# EAGLE board Opto_2 (EAGLE 6.5.0)
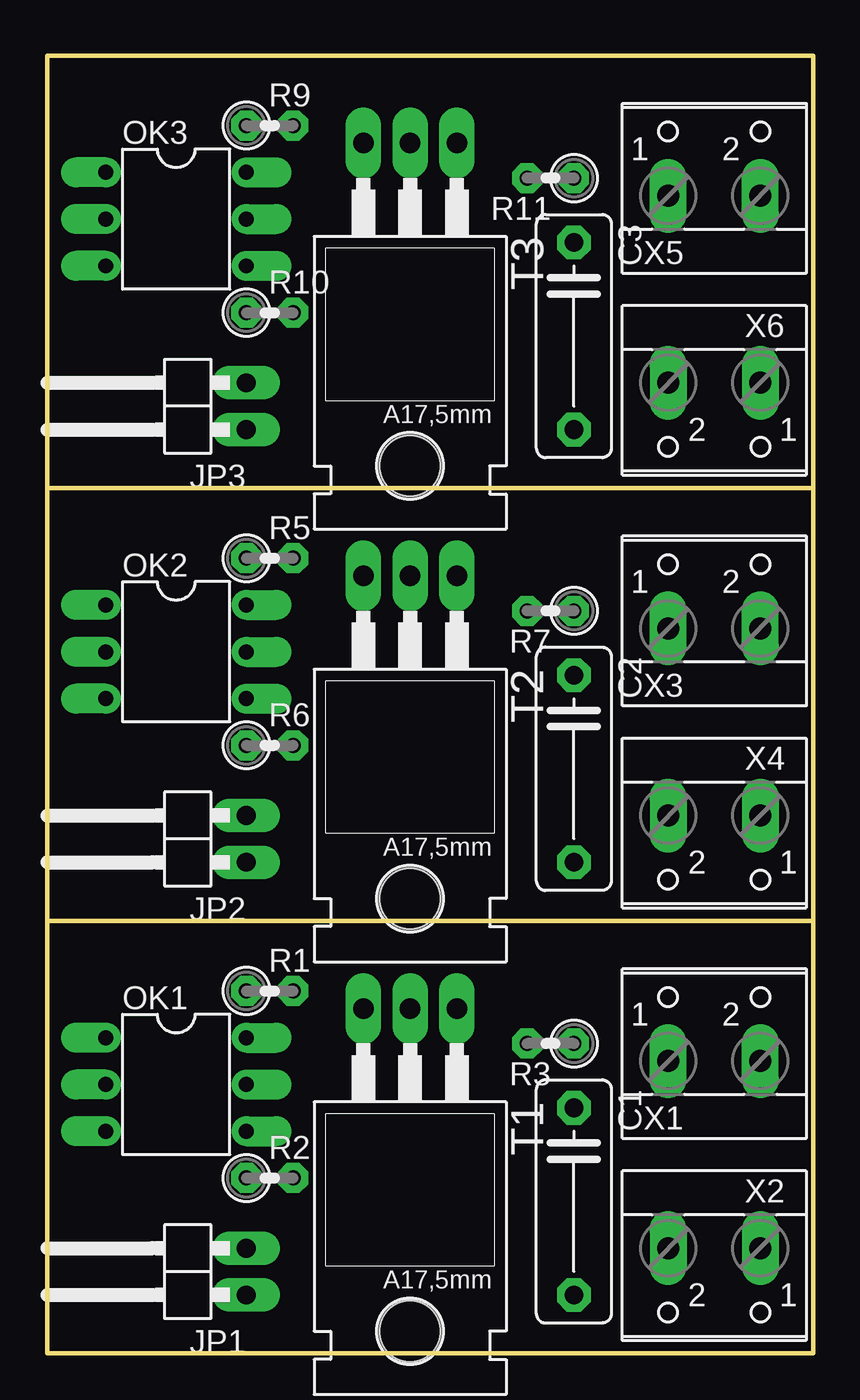
[diagram p0: board, top side]
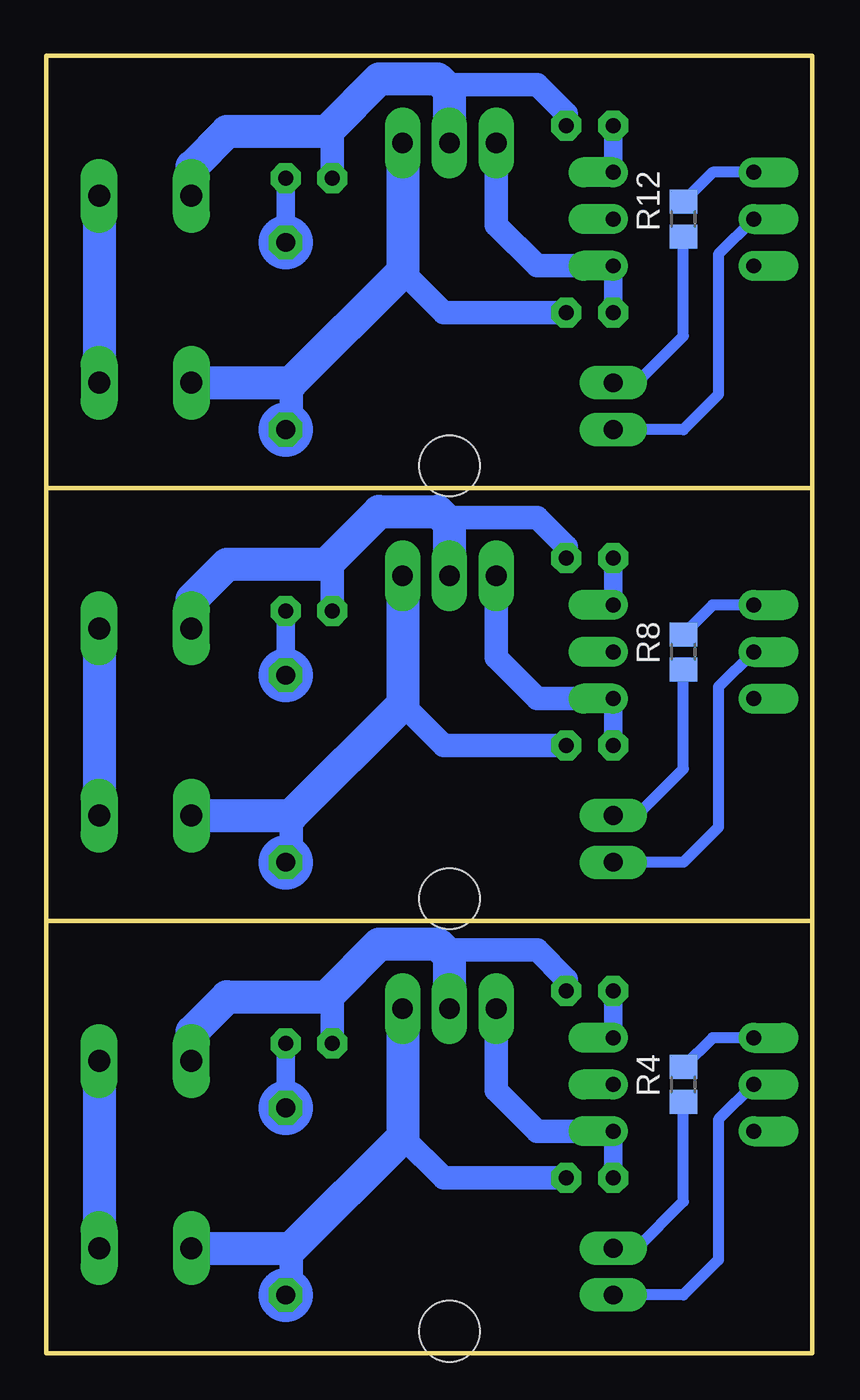
[diagram p1: board, bottom side, seen from below]

Size 41.58 x 70.47 mm. Coordinates in mm from the lower left corner, seen from the top.
Outline: 0,0 41.58,0 41.58,23.48 0,23.48 0,0
Outline: 0,23.5 41.58,23.5 41.58,46.98 0,46.98 0,23.5
Outline: 0,46.99 41.58,46.99 41.58,70.47 0,70.47 0,46.99
Copper layers (1*16): Top 0.035mm / dielectric 1.5mm / Bottom 0.035mm
Design rules "default": minimum track width 12mil, minimum drill 32mil, track to track 12mil, track to pad 12mil, pad to pad 12mil, via to via 12mil, smd to smd 8mil, copper to edge 40mil, drill to drill 8mil, minimum pad ring 16mil, minimum via ring 12mil, stop-mask expansion 4mil, vias tented up to drill 0mil, thermal gap 20mil

## Footprints (pad centres in the part's own frame; a part is rotated, then mirrored left to right if it is on the bottom)
C102-043X133 = drill 1.016 octagon: 1 -5.08,0; 2 5.08,0
1X02/90 = drill 1.016 long: 1 -1.27,-3.81; 2 1.27,-3.81
DIL06 = drill 0.813 offset: 1 -2.54,-3.81; 2 0,-3.81; 3 2.54,-3.81; 4 2.54,3.81; 5 0,3.81; 6 -2.54,3.81
0207/2V = drill 0.813 octagon: 1 -1.27,0; 2 1.27,0
R0805 = smd 1.3 x 1.5: 1 -0.95,0; 2 0.95,0
TO220AB = drill 1.118 long: 1 -2.54,-6.35; 2 0,-6.35; 3 2.54,-6.35 | hole 3.302: 0,11.176
W237-102 = drill 1.194 long: 1 -2.5,-1.27; 2 2.5,-1.27

## Placement (x,y rotation side)
C1  0.01uF  [C102-043X133]  28.57,8.26 270 top
C2  0.01uF  [C102-043X133]  28.57,31.75 270 top
C3  0.01uF  [C102-043X133]  28.57,55.24 270 top
JP1  [1X02/90]  6.99,4.45 90 top
JP2  [1X02/90]  6.99,27.94 90 top
JP3  [1X02/90]  6.99,51.44 90 top
OK1  MOC3022M  [DIL06]  6.99,14.61 270 top
OK2  MOC3022M  [DIL06]  6.99,38.1 270 top
OK3  MOC3022M  [DIL06]  6.99,61.59 270 top
R1  200  [0207/2V]  12.06,19.68 0 top
R2  470k  [0207/2V]  12.06,9.53 0 top
R3  39  [0207/2V]  27.3,16.83 180 top
R4  470  [R0805]  6.99,14.61 90 bottom
R5  200  [0207/2V]  12.06,43.18 0 top
R6  470k  [0207/2V]  12.06,33.02 0 top
R7  39  [0207/2V]  27.3,40.32 180 top
R8  470  [R0805]  6.99,38.1 90 bottom
R9  200  [0207/2V]  12.06,66.67 0 top
R10  470k  [0207/2V]  12.06,56.52 0 top
R11  39  [0207/2V]  27.3,63.82 180 top
R12  470  [R0805]  6.99,61.59 90 bottom
T1  BT136  [TO220AB]  19.68,12.38 180 top
T2  BT136  [TO220AB]  19.68,35.88 180 top
T3  BT136  [TO220AB]  19.68,59.37 180 top
X1  [W237-102]  36.2,17.14 0 top
X2  [W237-102]  36.2,4.45 180 top
X3  [W237-102]  36.2,40.64 0 top
X4  [W237-102]  36.2,27.94 180 top
X5  [W237-102]  36.2,64.14 0 top
X6  [W237-102]  36.2,51.44 180 top

## Library data of the parts
C1-C3 R1-R12 = rcl
JP1-JP3 = pinhead
OK1-OK3 = optocoupler; MF: FAIRCHILD SEMICONDUCTOR; MPN: MOC3022-M; OC_FARNELL: 1021086; OC_NEWARK: 58K1956
T1-T3 = triac
X1-X6 = con-wago-500; MPN: 237-102; OC_FARNELL: unknown; OC_NEWARK: 70K9898

## Nets
N$1: OK1.4 R2.1 T1.3
N$2: C1.2 R2.2 T1.1 X2.2
N$3: OK1.6 R1.1
N$4: R1.2 R3.2 T1.2 X1.1
N$5: C1.1 R3.1
N$6: X1.2 X2.1
N$7: JP1.1 OK1.2
N$8: JP1.2 R4.1
N$9: OK1.1 R4.2
N$10: OK2.4 R6.1 T2.3
N$11: C2.2 R6.2 T2.1 X4.2
N$12: OK2.6 R5.1
N$13: R5.2 R7.2 T2.2 X3.1
N$14: C2.1 R7.1
N$15: JP2.1 OK2.2
N$16: JP2.2 R8.1
N$17: OK2.1 R8.2
N$18: X3.2 X4.1
N$19: OK3.4 R10.1 T3.3
N$20: C3.2 R10.2 T3.1 X6.2
N$21: OK3.6 R9.1
N$22: R9.2 R11.2 T3.2 X5.1
N$23: C3.1 R11.1
N$24: JP3.1 OK3.2
N$25: JP3.2 R12.1
N$26: OK3.1 R12.2
N$27: X5.2 X6.1

## Tracks (layer width: path | path; a pad name or v marks a point on that pad's centre or on a via)
N$1
  Bottom 1.016: R2.1 OK1.4
  Bottom 1.27: T1.3 17.14,14.29 14.92,12.06 OK1.4
N$2
  Bottom 1.27: 28.26,5.71 28.26,3.49 C1.2 | R2.2 20,9.53 22.23,11.75
  Bottom 1.778: T1.1 22.23,11.75 28.26,5.71 X2.2
N$3
  Bottom 1.016: R1.1 OK1.6
N$4
  Bottom 1.27: R3.2 26.04,19.37 26.19,19.53 | R1.2 13.34,20.32 14.92,21.91 20,21.91
  Bottom 1.778: X1.1 33.66,15.91 33.66,17.46 31.75,19.37 26.35,19.37 26.19,19.53 23.5,22.23 20.32,22.23 20,21.91 19.68,21.59 T1.2
N$5
  Bottom 1.016: C1.1 R3.1
N$6
  Bottom 1.778: X1.2 X2.1
N$7
  Bottom 0.61: OK1.2 5.08,12.7 5.08,5.08 6.99,3.17 JP1.1
N$8
  Bottom 0.61: JP1.2 9.53,5.71 6.99,8.26 R4.1
N$9
  Bottom 0.61: OK1.1 5.39,17.14 R4.2
N$10
  Bottom 1.016: R6.1 OK2.4
  Bottom 1.27: T2.3 17.14,37.78 14.92,35.56 OK2.4
N$11
  Bottom 1.27: 28.26,29.21 28.26,26.99 C2.2 | R6.2 20,33.02 22.23,35.24
  Bottom 1.778: T2.1 22.23,35.24 28.26,29.21 X4.2
N$12
  Bottom 1.016: R5.1 OK2.6
N$13
  Bottom 1.27: R7.2 26.04,42.86 26.19,43.02 | R5.2 13.34,43.81 14.92,45.4 20,45.4
  Bottom 1.778: X3.1 33.66,39.41 33.66,40.96 31.75,42.86 26.35,42.86 26.19,43.02 23.5,45.72 20.32,45.72 20,45.4 19.68,45.09 T2.2
N$14
  Bottom 1.016: C2.1 R7.1
N$15
  Bottom 0.61: OK2.2 5.08,36.2 5.08,28.57 6.99,26.67 JP2.1
N$16
  Bottom 0.61: JP2.2 9.53,29.21 6.99,31.75 R8.1
N$17
  Bottom 0.61: OK2.1 5.39,40.64 R8.2
N$18
  Bottom 1.778: X3.2 X4.1
N$19
  Bottom 1.016: R10.1 OK3.4
  Bottom 1.27: T3.3 17.14,61.28 14.92,59.05 OK3.4
N$20
  Bottom 1.27: 28.26,52.7 28.26,50.48 C3.2 | R10.2 20,56.52 22.23,58.74
  Bottom 1.778: T3.1 22.23,58.74 28.26,52.7 X6.2
N$21
  Bottom 1.016: R9.1 OK3.6
N$22
  Bottom 1.27: R11.2 26.04,66.36 26.19,66.52 | R9.2 13.34,67.31 14.92,68.9 20,68.9
  Bottom 1.778: X5.1 33.66,62.91 33.66,64.45 31.75,66.36 26.35,66.36 26.19,66.52 23.5,69.22 20.32,69.22 20,68.9 19.68,68.58 T3.2
N$23
  Bottom 1.016: C3.1 R11.1
N$24
  Bottom 0.61: OK3.2 5.08,59.69 5.08,52.07 6.99,50.16 JP3.1
N$25
  Bottom 0.61: JP3.2 9.53,52.7 6.99,55.24 R12.1
N$26
  Bottom 0.61: OK3.1 5.39,64.14 R12.2
N$27
  Bottom 1.778: X5.2 X6.1
(copper drawn outside any net)
  shapes: Bottom circle x6